# Altium PCB GSH_Bed v1.0.PcbDoc (part 3 of 6)
Units mil, origin at the board's own origin, x right, y up, seen from the top; angles counter-clockwise.
Board outline 4724.41 x 4921.3 mil, 2 copper layers (Top Layer, Bottom Layer); 2 components, 3 nets, 5 pads, 0 vias.
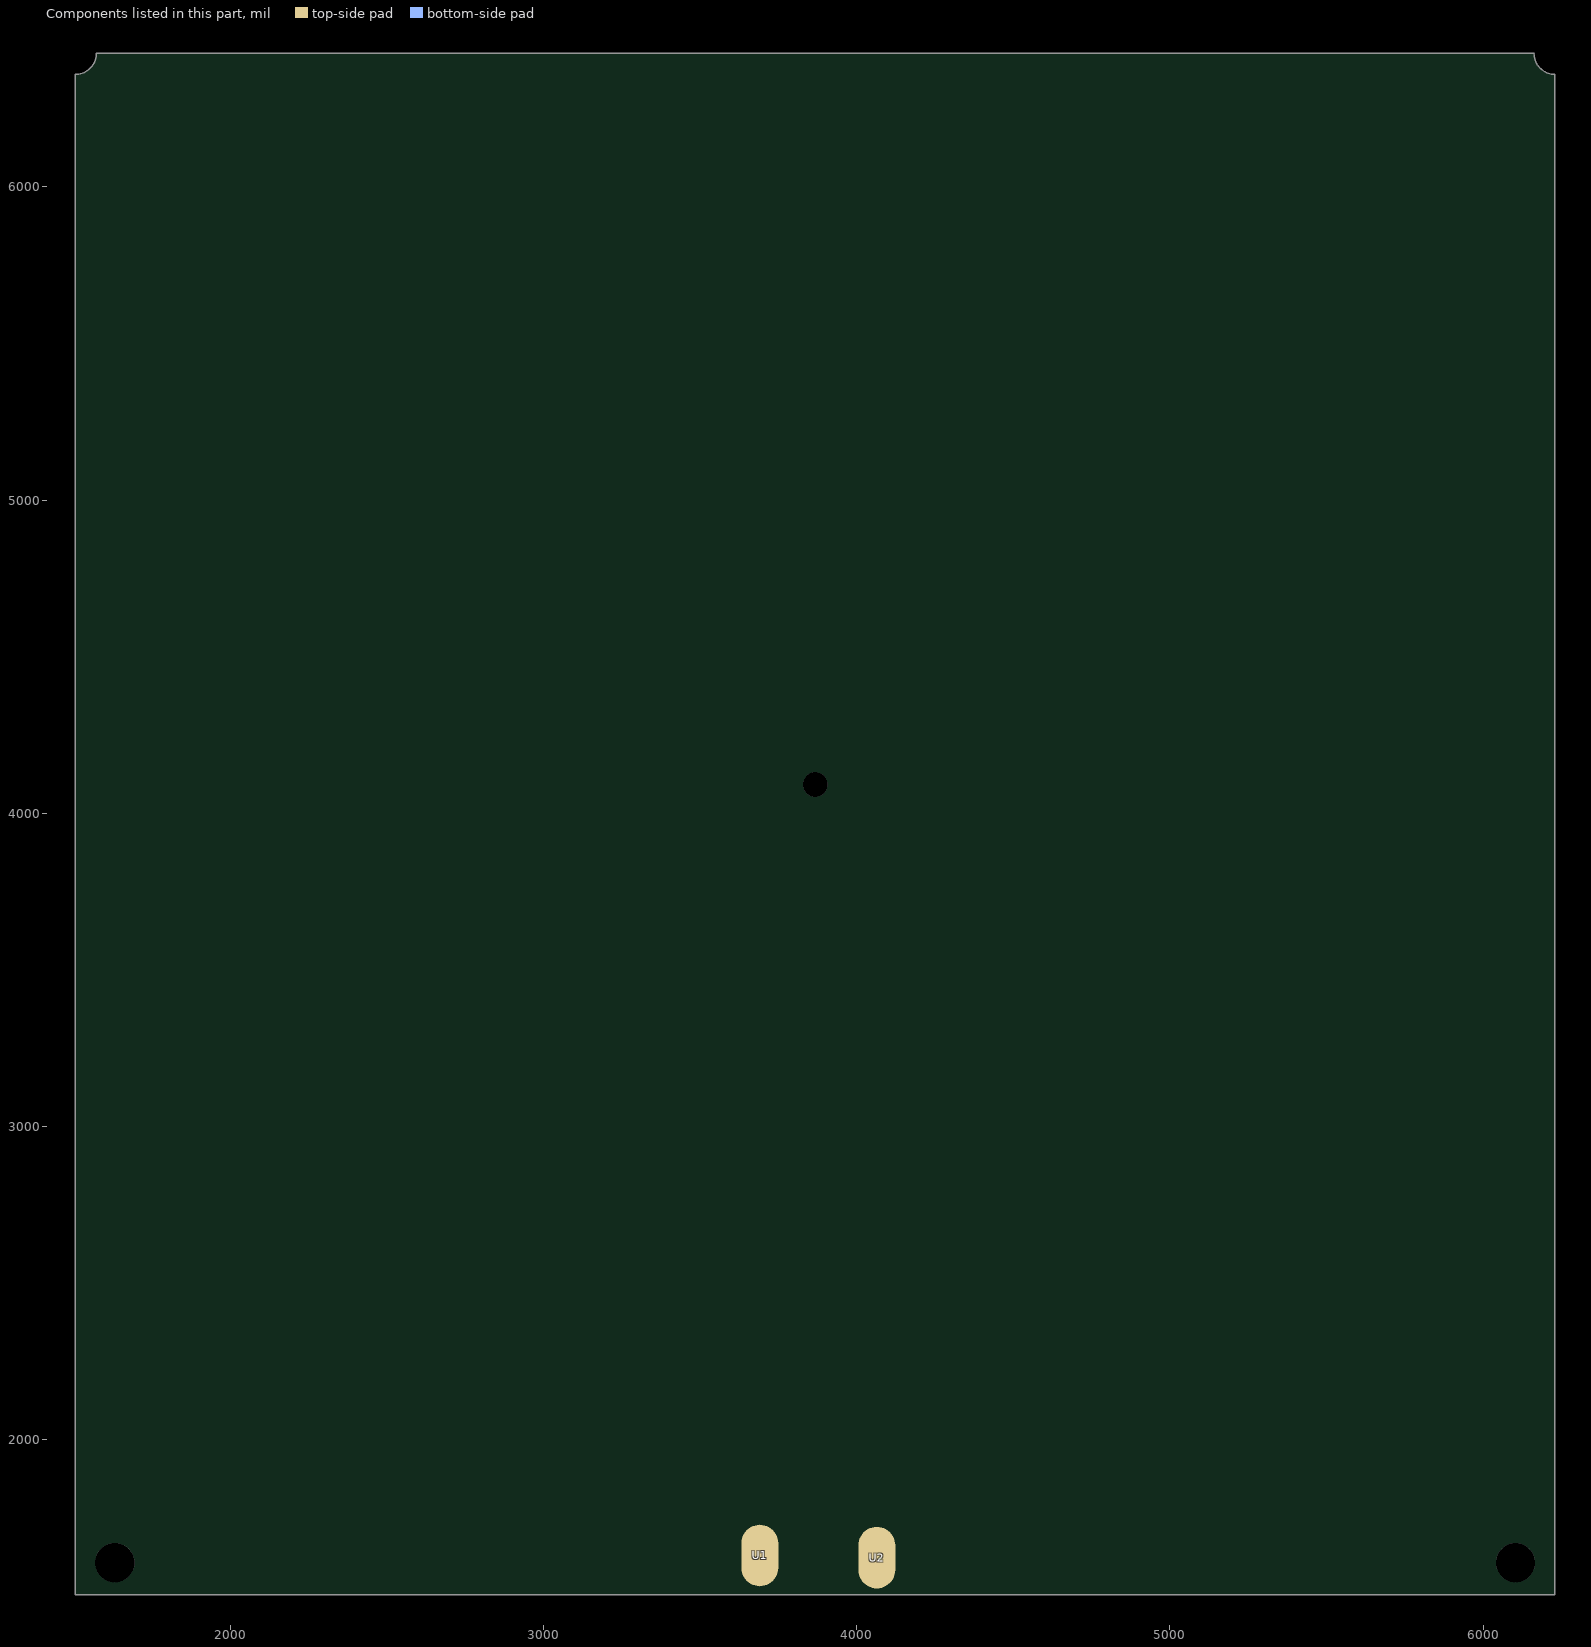
[diagram p3: the components of this part, seen from the top]

## Nets (pads, with @x,y where several pads share a name; then routed paths per layer and width w, separated by ;. In a path a pad name is that pad's centre, name@x,y a point inside that pad or via, vN(x,y) a via of type N, cw(c..) or ccw(c..) an arc to the next point about the centre after c; other vN are vias at no path point) (continued)
copper on no net: (continued)
  Top Layer w25.59: 1758.97,3213.62 1688.11,3213.62 1688.11,3249.07 1723.54,3249.07 1723.54,3319.93 1688.11,3319.93 1688.11,3284.5 1652.68,3284.5 1652.68,3319.93 1617.24,3319.93 1617.24,3249.07 1652.68,3249.07 1652.68,3213.63 1617.24,3213.63 1617.24,3142.77 1652.68,3142.77 1652.68,3178.2 1723.54,3178.2 1723.54,3142.77 1688.11,3142.77 1688.11,3107.33 1723.54,3107.33 1723.54,3071.9 1652.68,3071.9 1652.68,3107.33 1617.24,3107.33 1617.24,3036.47 1652.67,3036.47 1652.67,3001.03 1617.24,3001.03 1617.24,2930.17 1652.67,2930.17 1652.67,2965.59 1688.1,2965.59 1688.1,2930.17 1723.54,2930.17 1723.54,3001.03 1688.1,3001.03 1688.1,3036.46 1723.54,3036.46 1794.4,3036.46 1794.4,3001.02 1758.96,3001.02 1758.96,2930.16 1794.4,2930.16 1794.4,2965.59 1829.83,2965.59 1829.83,2930.16 1865.27,2930.16 1865.27,3001.02 1829.83,3001.02 1829.83,3036.46 1865.26,3036.46 1865.26,3107.32 1829.83,3107.32 1829.83,3071.89 1758.96,3071.89 1758.96,3107.32 1794.4,3107.32 1794.4,3142.75 1758.96,3142.75 1758.96,3178.19 1829.83,3178.19 1829.83,3142.75 1865.27,3142.75 1865.27,3178.19 1900.7,3178.19 1900.7,3142.76 1936.13,3142.76 1936.13,3178.19 2007,3178.19 2007,3142.76 1971.57,3142.76 1971.57,3107.33 2007,3107.33 2007,3071.89 1936.13,3071.89 1936.13,3107.33 1900.69,3107.33 1900.69,3036.46 1936.13,3036.46 1936.13,3001.02 1900.69,3001.02 1900.69,2930.16 1936.13,2930.16 1936.13,2965.59 1971.56,2965.59 1971.56,2930.16 2007,2930.16 2007,3001.02 1971.56,3001.02 1971.56,3036.45 2006.99,3036.45 2077.86,3036.45 2077.86,3001.01 2042.43,3001.01 2042.43,2930.15 2077.86,2930.15 2077.86,2965.58 2113.29,2965.58 2113.29,2930.15 2148.73,2930.15 2148.73,3001.01 2113.29,3001.01 2113.29,3036.45 2148.73,3036.45 2148.73,3107.32 2113.29,3107.32 2113.29,3071.88 2042.43,3071.88 2042.43,3107.32 2077.86,3107.32 2077.86,3142.75 2042.43,3142.75 2042.43,3178.18 2113.29,3178.18 2113.29,3142.75 2148.73,3142.75 2148.73,3178.18 2148.73,3213.61 2113.3,3213.61 2113.3,3249.05 2148.73,3249.05 2148.73,3319.92 2113.3,3319.92 2113.3,3284.48 2077.86,3284.48 2077.86,3319.92 2042.43,3319.92 2042.43,3249.05 2077.86,3249.05 2077.86,3213.62 2007,3213.62 2007,3249.05 1971.56,3249.05 1971.56,3213.62 1900.7,3213.62 1900.7,3249.05 1936.13,3249.05 1936.13,3284.48 1900.7,3284.48 1900.7,3319.92 1971.56,3319.92 1971.56,3284.48 2007,3284.48 2007,3355.35 2007,3390.78 1971.57,3390.78 1971.57,3355.35 1900.7,3355.35 1900.7,3390.78 1936.13,3390.78 1936.13,3426.22 1900.7,3426.22 1900.7,3461.65 1971.57,3461.65 1971.57,3426.22 2007.01,3426.22 2007.01,3461.65 2077.87,3461.65 2077.87,3426.21 2042.44,3426.21 2042.44,3355.35 2077.87,3355.35 2077.87,3390.78 2113.31,3390.78 2113.31,3355.35 2148.74,3355.35 2148.74,3426.21 2113.31,3426.21 2113.31,3461.64 2184.17,3461.64 2219.61,3461.64 2219.61,3426.2 2184.17,3426.2 2184.17,3355.33 2219.61,3355.33 2219.61,3390.77 2255.04,3390.77 2255.04,3355.33 2290.47,3355.33 2290.47,3426.2 2255.04,3426.2 2255.04,3461.63 2325.91,3461.63 2325.91,3426.2 2361.34,3426.2 2361.34,3461.64 2432.2,3461.64 2432.2,3426.2 2396.77,3426.2 2396.77,3390.77 2432.2,3390.77 2432.2,3355.33 2361.34,3355.33 2361.34,3390.77 2325.9,3390.77 2325.9,3319.9 2325.9,3284.47 2361.34,3284.47 2361.34,3319.9 2432.2,3319.9 2432.2,3284.47 2396.77,3284.47 2396.77,3249.04 2432.2,3249.04 2432.2,3213.6 2361.34,3213.6 2361.34,3249.04 2325.9,3249.04 2325.9,3213.6 2255.03,3213.6 2255.03,3249.04 2290.46,3249.04 2290.46,3319.9 2255.03,3319.9 2255.03,3284.47 2219.6,3284.47 2219.6,3319.9 2184.16,3319.9 2184.16,3249.04 2219.6,3249.04 2219.6,3213.61 2184.16,3213.61 2184.16,3142.74 2219.6,3142.74 2219.6,3178.18 2290.46,3178.18 2290.46,3142.74 2255.03,3142.74 2255.03,3107.31 2290.46,3107.31 2290.46,3071.88 2219.6,3071.88 2219.6,3107.31 2184.16,3107.31 2184.16,3036.45 2219.59,3036.45 2219.59,3001.01 2184.16,3001.01 2184.16,2930.14 2219.59,2930.14 2219.59,2965.57 2255.02,2965.57 2255.02,2930.14 2290.46,2930.14 2290.46,3001.01 2255.02,3001.01 2255.02,3036.44 2290.46,3036.44 2361.32,3036.44 2361.32,3001 2325.89,3001 2325.89,2930.14 2361.32,2930.14 2361.32,2965.57 2396.76,2965.57 2396.76,2930.14 2432.19,2930.14 2432.19,3001 2396.76,3001 2396.76,3036.43 2432.19,3036.43 2432.19,3107.3 2396.75,3107.3 2396.75,3071.87 2325.89,3071.87 2325.89,3107.3 2361.32,3107.3 2361.32,3142.73 2325.89,3142.73 2325.89,3178.17 2396.75,3178.17 2396.75,3142.73 2432.19,3142.73 2432.19,3178.17 2467.62,3178.17 2467.62,3142.74 2503.06,3142.74 2503.06,3178.17 2573.92,3178.17 2573.92,3142.74 2538.49,3142.74 2538.49,3107.3 2573.92,3107.3 2573.92,3071.87 2503.06,3071.87 2503.06,3107.3 2467.62,3107.3 2467.62,3036.44 2503.05,3036.44 2503.05,3001 2467.62,3001 2467.62,2930.14 2503.05,2930.14 2503.05,2965.57 2538.48,2965.57 2538.48,2930.14 2573.92,2930.14 2573.92,3001 2538.48,3001 2538.48,3036.43 2573.92,3036.43 2644.78,3036.43 2644.78,3000.99 2609.35,3000.99 2609.35,2930.13 2644.78,2930.13 2644.78,2965.56 2680.22,2965.56 2680.22,2930.13 2715.65,2930.13 2715.65,3000.99 2680.22,3000.99 2680.22,3036.43 2715.65,3036.43 2715.65,3107.3 2680.21,3107.3 2680.21,3071.86 2609.35,3071.86 2609.35,3107.3 2644.78,3107.3 2644.78,3142.73 2609.35,3142.73 2609.35,3178.16 2680.21,3178.16 2680.21,3142.73 2715.65,3142.73 2715.65,3178.16 2715.65,3213.59 2680.22,3213.59 2680.22,3249.03 2715.65,3249.03 2715.65,3319.9 2680.22,3319.9 2680.22,3284.47 2644.78,3284.47 2644.78,3319.9 2609.35,3319.9 2609.35,3249.03 2644.78,3249.03 2644.78,3213.6 2573.92,3213.6 2573.92,3249.03 2538.48,3249.03 2538.48,3213.6 2467.62,3213.6 2467.62,3249.03 2503.05,3249.03 2503.05,3284.46 2467.62,3284.46 2467.62,3319.9 2538.48,3319.9 2538.48,3284.46 2573.92,3284.46 2573.92,3355.33 2573.92,3390.76 2538.49,3390.76 2538.49,3355.33 2467.63,3355.33 2467.63,3390.76 2503.06,3390.76 2503.06,3426.19 2467.63,3426.19 2467.63,3461.63 2538.49,3461.63 2538.49,3426.19 2573.93,3426.19 2573.93,3461.63 2644.8,3461.63 2644.8,3426.19 2609.36,3426.19 2609.36,3355.33 2644.8,3355.33 2644.8,3390.76 2680.23,3390.76 2680.23,3355.33 2715.66,3355.33 2715.66,3426.19 2680.23,3426.19 2680.23,3461.62 2715.66,3461.62 2715.66,3532.49 2680.23,3532.49 2680.23,3497.05 2609.36,3497.05 2609.36,3532.49 2644.8,3532.49 2644.8,3567.92 2609.36,3567.92 2609.36,3603.35 2680.23,3603.35 2680.23,3567.92 2715.67,3567.92 2715.67,3638.78 2680.23,3638.79 2680.23,3674.23 2715.67,3674.23 2715.67,3745.09 2680.23,3745.09 2680.23,3709.66 2644.8,3709.66 2644.8,3745.09 2609.36,3745.09 2609.36,3674.23 2644.8,3674.23 2644.8,3638.79 2609.37,3638.79 2538.5,3638.79 2538.5,3674.23 2573.94,3674.23 2573.94,3745.09 2538.5,3745.09 2538.5,3709.66 2503.07,3709.66 2503.07,3745.09 2467.63,3745.09 2467.63,3674.23 2503.07,3674.23 2503.07,3638.8 2467.64,3638.8 2467.64,3567.93 2503.07,3567.93 2503.07,3603.36 2573.94,3603.36 2573.94,3567.93 2538.5,3567.93 2538.5,3532.5 2573.94,3532.5 2573.94,3497.06 2503.07,3497.06 2503.07,3532.5 2467.63,3532.5 2467.63,3497.06 2432.2,3497.06 2396.76,3497.06 2396.76,3532.5 2432.2,3532.5 2432.2,3603.37 2396.76,3603.37 2396.76,3567.93 2361.33,3567.93 2361.33,3603.37 2325.9,3603.37 2325.9,3532.5 2361.33,3532.5 2361.33,3497.07 2290.47,3497.07 2290.47,3532.5 2255.03,3532.5 2255.03,3497.07 2184.17,3497.07 2184.17,3532.5 2219.6,3532.5 2219.6,3567.93 2184.17,3567.93 2184.17,3603.37 2255.03,3603.37 2255.03,3567.93 2290.47,3567.93 2290.47,3638.8 2290.47,3674.23 2255.04,3674.23 2255.04,3638.8 2184.18,3638.8 2184.18,3674.23 2219.61,3674.23 2219.61,3709.66 2184.18,3709.66 2184.18,3745.1 2255.04,3745.1 2255.04,3709.66 2290.48,3709.66 2290.48,3745.1 2361.34,3745.1 2361.34,3709.66 2325.91,3709.66 2325.91,3638.8 2361.34,3638.8 2361.34,3674.23 2396.78,3674.23 2396.78,3638.8 2432.21,3638.8 2432.21,3709.66 2396.78,3709.66 2396.78,3745.09 2432.21,3745.09 2432.21,3780.52 2396.77,3780.52 2396.77,3815.96 2432.21,3815.96 2432.21,3886.83 2396.77,3886.83 2396.77,3851.39 2361.34,3851.39 2361.34,3886.83 2325.91,3886.83 2325.91,3815.96 2361.34,3815.96 2361.34,3780.53 2290.47,3780.53 2290.47,3815.96 2255.04,3815.96 2255.04,3780.53 2184.18,3780.53 2184.18,3815.96 2219.61,3815.96 2219.61,3851.39 2184.18,3851.39 2184.18,3886.83 2255.04,3886.83 2255.04,3851.39 2290.48,3851.39 2290.48,3922.26 2290.48,3957.69 2255.04,3957.69 2255.04,3922.26 2184.18,3922.26 2184.18,3957.69 2219.61,3957.69 2219.61,3993.12 2184.18,3993.12 2184.18,4028.56 2255.04,4028.56 2255.04,3993.12 2290.48,3993.12 2290.48,4028.56 2361.35,4028.56 2361.35,3993.12 2325.92,3993.12 2325.92,3922.26 2361.35,3922.26 2361.35,3957.68 2396.78,3957.68 2396.78,3922.26 2432.22,3922.26 2432.22,3993.12 2396.78,3993.12 2396.78,4028.55 2467.65,4028.55 2467.65,3993.12 2503.08,3993.12 2503.08,4028.55 2573.94,4028.55 2573.94,3993.12 2538.51,3993.12 2538.51,3957.68 2573.94,3957.68 2573.94,3922.25 2503.08,3922.25 2503.08,3957.68 2467.64,3957.68 2467.64,3886.82 2503.08,3886.82 2503.08,3851.38 2467.64,3851.38 2467.64,3780.52 2503.08,3780.52 2503.08,3815.95 2538.51,3815.95 2538.51,3780.52 2573.94,3780.52 2573.94,3851.38 2538.51,3851.38 2538.51,3886.81 2573.94,3886.81 2644.81,3886.81 2644.81,3851.37 2609.37,3851.37 2609.37,3780.51 2644.81,3780.51 2644.81,3815.94 2680.24,3815.94 2680.24,3780.51 2715.67,3780.51 2715.67,3851.37 2680.24,3851.37 2680.24,3886.81 2715.67,3886.81 2715.67,3957.68 2680.24,3957.68 2680.24,3922.24 2609.37,3922.24 2609.37,3957.68 2644.8,3957.68 2644.8,3993.11 2609.37,3993.11 2609.37,4028.54 2680.24,4028.54 2680.24,3993.11 2715.68,3993.11 2715.68,4028.54 2751.11,4028.54 2786.54,4028.54 2786.54,3993.1 2751.11,3993.1 2751.11,3922.24 2786.54,3922.24 2786.54,3957.67 2821.97,3957.67 2821.97,3922.24 2857.41,3922.24 2857.41,3993.1 2821.97,3993.1 2821.97,4028.54 2892.84,4028.54 2892.84,3993.11 2928.28,3993.11 2928.28,4028.54 2999.14,4028.54 2999.14,3993.11 2963.71,3993.11 2963.71,3957.67 2999.14,3957.67 2999.14,3922.24 2928.28,3922.24 2928.28,3957.67 2892.84,3957.67 2892.84,3886.81 2892.84,3851.37 2928.27,3851.37 2928.27,3886.81 2999.13,3886.81 2999.13,3851.37 2963.7,3851.37 2963.7,3815.94 2999.13,3815.94 2999.13,3780.51 2928.27,3780.51 2928.27,3815.94 2892.83,3815.94 2892.83,3780.51 2821.97,3780.51 2821.97,3815.95 2857.4,3815.95 2857.4,3886.81 2821.97,3886.81 2821.97,3851.38 2786.53,3851.38 2786.53,3886.81 2751.1,3886.81 2751.1,3815.95 2786.53,3815.95 2786.53,3780.51 2751.1,3780.51 2751.1,3709.65 2786.53,3709.65 2786.53,3745.08 2857.39,3745.08 2857.39,3709.65 2821.97,3709.65 2821.97,3674.22 2857.39,3674.22 2857.39,3638.78 2786.53,3638.78 2786.53,3674.22 2751.09,3674.22 2751.09,3603.35 2786.53,3603.35 2786.53,3567.91 2751.09,3567.91 2751.09,3497.05 2786.53,3497.05 2786.53,3532.48 2821.96,3532.48 2821.96,3497.05 2857.39,3497.05 2857.39,3567.91 2821.96,3567.91 2821.96,3603.34 2857.39,3603.34 2928.26,3603.34 2928.26,3567.91 2892.82,3567.91 2892.82,3497.04 2928.26,3497.04 2928.26,3532.47 2963.69,3532.47 2963.69,3497.04 2999.12,3497.04 2999.12,3567.91 2963.69,3567.91 2963.69,3603.34 2999.12,3603.34 2999.12,3674.21 2963.69,3674.21 2963.69,3638.77 2892.82,3638.77 2892.82,3674.21 2928.26,3674.21 2928.26,3709.64 2892.82,3709.64 2892.82,3745.07 2963.69,3745.07 2963.69,3709.64 2999.13,3709.64 2999.13,3745.07 3034.56,3745.07 3034.56,3709.64 3069.99,3709.64 3069.99,3745.07 3140.85,3745.07 3140.85,3709.64 3105.42,3709.64 3105.42,3674.21 3140.85,3674.21 3140.85,3638.77 3069.99,3638.77 3069.99,3674.21 3034.55,3674.21 3034.55,3603.34 3069.99,3603.34 3069.99,3567.9 3034.55,3567.9 3034.55,3497.04 3069.99,3497.04 3069.99,3532.47 3105.42,3532.47 3105.42,3497.04 3140.85,3497.04 3140.85,3567.9 3105.42,3567.9 3105.42,3603.34 3140.85,3603.34 3211.72,3603.34 3211.72,3567.9 3176.28,3567.9 3176.28,3497.03 3211.72,3497.03 3211.72,3532.47 3247.15,3532.47 3247.15,3497.03 3282.59,3497.03 3282.59,3567.9 3247.15,3567.9 3247.15,3603.33 3282.58,3603.33 3282.58,3674.2 3247.15,3674.2 3247.15,3638.76 3176.28,3638.76 3176.28,3674.2 3211.72,3674.2 3211.72,3709.63 3176.28,3709.63 3176.28,3745.07 3247.15,3745.07 3247.15,3709.63 3282.59,3709.63 3282.59,3745.07 3282.59,3780.5 3247.15,3780.5 3247.15,3815.94 3282.59,3815.94 3282.59,3886.8 3247.15,3886.8 3247.15,3851.37 3211.72,3851.37 3211.72,3886.8 3176.29,3886.8 3176.29,3815.94 3211.72,3815.94 3211.72,3780.51 3140.85,3780.51 3140.85,3815.93 3105.42,3815.93 3105.42,3780.5 3034.55,3780.5 3034.55,3815.93 3069.99,3815.93 3069.99,3851.37 3034.55,3851.37 3034.55,3886.8 3105.42,3886.8 3105.42,3851.37 3140.86,3851.37 3140.86,3922.24 3140.86,3957.67 3105.42,3957.67 3105.42,3922.23 3034.56,3922.23 3034.56,3957.67 3069.99,3957.67 3069.99,3993.1 3034.56,3993.1 3034.56,4028.53 3105.42,4028.53 3105.42,3993.1 3140.86,3993.1 3140.86,4028.53 3211.73,4028.53 3211.73,3993.09 3176.3,3993.09 3176.3,3922.23 3211.73,3922.23 3211.73,3957.66 3247.16,3957.66 3247.16,3922.23 3282.6,3922.23 3282.6,3993.09 3247.16,3993.09 3247.16,4028.53 3318.03,4028.53 3318.03,3993.09 3353.46,3993.09 3353.46,4028.53 3424.32,4028.53 3424.32,3993.09 3388.89,3993.09 3388.89,3957.66 3424.32,3957.66 3424.32,3922.23 3353.46,3922.23 3353.46,3957.66 3318.02,3957.66 3318.02,3886.8 3353.46,3886.79 3353.46,3851.36 3318.02,3851.36 3318.02,3780.49 3353.46,3780.49 3353.46,3815.92 3388.89,3815.92 3388.89,3780.49 3424.32,3780.49 3424.32,3851.36 3388.89,3851.36 3388.89,3886.79 3424.32,3886.79 3495.19,3886.79 3495.19,3851.35 3459.75,3851.35 3459.75,3780.49 3495.19,3780.49 3495.19,3815.92 3530.62,3815.92 3530.62,3780.49 3566.05,3780.49 3566.05,3851.35 3530.62,3851.35 3530.62,3886.78 3566.05,3886.78 3566.05,3957.65 3530.62,3957.65 3530.62,3922.22 3459.75,3922.22 3459.75,3957.65 3495.18,3957.65 3495.18,3993.08 3459.75,3993.08 3459.75,4028.52 3530.62,4028.52 3530.62,3993.08 3566.06,3993.08 3566.06,4028.52 3601.49,4028.52 3636.92,4028.52 3636.92,3993.08 3601.49,3993.08 3601.49,3922.21 3636.92,3922.21 3636.92,3957.65 3672.36,3957.65 3672.36,3922.21 3707.79,3922.21 3707.79,3993.08 3672.36,3993.08 3672.36,4028.51 3743.22,4028.51 3743.22,3993.08 3778.66,3993.08 3778.66,4028.51 3849.52,4028.51 3849.52,3993.08 3814.09,3993.08 3814.09,3957.65 3849.52,3957.65 3849.52,3922.21 3778.66,3922.21 3778.66,3957.65 3743.22,3957.65 3743.22,3886.78 3743.22,3851.35 3778.65,3851.35 3778.65,3886.78 3849.51,3886.78 3849.51,3851.35 3814.08,3851.35 3814.08,3815.92 3849.51,3815.92 3849.51,3780.48 3778.65,3780.48 3778.65,3815.92 3743.21,3815.92 3743.21,3780.48 3672.35,3780.48 3672.35,3815.92 3707.78,3815.92 3707.78,3886.78 3672.35,3886.78 3672.35,3851.36 3636.91,3851.36 3636.91,3886.78 3601.48,3886.78 3601.48,3815.92 3636.91,3815.92 3636.91,3780.49 3601.48,3780.49 3601.48,3745.06 3636.92,3745.06 3636.92,3709.62 3601.48,3709.62 3601.48,3638.76 3636.92,3638.76 3636.92,3674.19 3672.35,3674.19 3672.35,3638.76 3707.78,3638.76 3707.78,3709.62 3672.35,3709.62 3672.35,3745.05 3743.22,3745.05 3743.22,3709.62 3778.65,3709.62 3778.65,3745.06 3849.51,3745.06 3849.51,3709.62 3814.08,3709.62 3814.08,3674.19 3849.51,3674.19 3849.51,3638.76 3778.65,3638.76 3778.65,3674.19 3743.21,3674.19 3743.21,3603.32 3743.21,3567.89 3778.64,3567.89 3778.64,3603.32 3849.51,3603.32 3849.51,3567.89 3814.08,3567.89 3814.08,3532.46 3849.51,3532.46 3849.51,3497.02 3778.64,3497.02 3778.64,3532.46 3743.2,3532.46 3743.2,3497.02 3672.34,3497.02 3672.34,3532.46 3707.77,3532.46 3707.77,3603.32 3672.34,3603.32 3672.34,3567.89 3636.91,3567.89 3636.91,3603.32 3601.47,3603.32 3601.47,3532.46 3636.91,3532.46 3636.91,3497.03 3566.04,3497.03 3566.04,3532.46 3530.61,3532.46 3530.61,3497.03 3459.75,3497.03 3459.75,3532.46 3495.18,3532.46 3495.18,3567.89 3459.75,3567.89 3459.75,3603.33 3530.61,3603.33 3530.61,3567.89 3566.05,3567.89 3566.05,3638.76 3530.61,3638.76 3530.61,3674.2 3566.05,3674.2 3566.05,3745.06 3530.61,3745.06 3530.61,3709.63 3495.18,3709.63 3495.18,3745.06 3459.75,3745.06 3459.75,3674.2 3495.18,3674.2 3495.18,3638.77 3459.75,3638.77 3388.88,3638.77 3388.88,3674.21 3424.32,3674.21 3424.32,3745.07 3388.88,3745.07 3388.88,3709.64 3353.45,3709.64 3353.45,3745.07 3318.01,3745.07 3318.01,3674.21 3353.45,3674.21 3353.45,3638.77 3318.02,3638.77 3318.02,3567.91 3353.45,3567.91 3353.45,3603.34 3424.32,3603.34 3424.32,3567.91 3388.88,3567.91 3388.88,3532.47 3424.32,3532.47 3424.32,3497.04 3353.45,3497.04 3353.45,3532.47 3318.01,3532.47 3318.01,3497.04 3318.01,3426.17 3353.44,3426.17 3353.44,3461.61 3424.3,3461.61 3424.3,3426.17 3388.87,3426.17 3388.87,3390.74 3424.3,3390.74 3424.3,3355.3 3353.44,3355.3 3353.44,3390.74 3318,3390.74 3318,3319.87 3353.43,3319.87 3353.43,3284.43 3318,3284.43 3318,3213.57 3353.43,3213.57 3353.43,3249 3388.87,3249 3388.87,3213.57 3424.3,3213.57 3424.3,3284.43 3388.87,3284.43 3388.87,3319.87 3424.3,3319.87 3495.17,3319.87 3495.17,3284.43 3459.73,3284.43 3459.73,3213.56 3495.17,3213.56 3495.17,3248.99 3530.6,3248.99 3530.6,3213.56 3566.03,3213.56 3566.03,3284.43 3530.6,3284.43 3530.6,3319.86 3566.03,3319.86 3566.03,3390.73 3530.59,3390.73 3530.59,3355.29 3459.73,3355.29 3459.73,3390.73 3495.17,3390.73 3495.17,3426.16 3459.73,3426.16 3459.73,3461.6 3530.59,3461.6 3530.59,3426.16 3566.03,3426.16 3566.03,3461.6 3601.46,3461.6 3636.9,3461.6 3636.9,3426.16 3601.47,3426.16 3601.47,3355.29 3636.9,3355.29 3636.9,3390.72 3672.33,3390.72 3672.33,3355.29 3707.77,3355.29 3707.77,3426.16 3672.33,3426.16 3672.33,3461.59 3743.2,3461.59 3743.2,3426.16 3778.64,3426.16 3778.64,3461.59 3849.5,3461.59 3849.5,3426.16 3814.07,3426.16 3814.07,3390.73 3849.5,3390.73 3849.5,3355.29 3778.64,3355.29 3778.64,3390.73 3743.2,3390.73 3743.2,3319.86 3743.2,3284.43 3778.63,3284.43 3778.63,3319.86 3849.49,3319.86 3849.49,3284.43 3814.06,3284.43 3814.06,3248.99 3849.49,3248.99 3849.49,3213.56 3778.63,3213.56 3778.63,3248.99 3743.19,3248.99 3743.19,3213.56 3672.32,3213.56 3672.32,3249 3707.76,3249 3707.76,3319.86 3672.32,3319.86 3672.32,3284.43 3636.89,3284.43 3636.89,3319.86 3601.46,3319.86 3601.46,3249 3636.89,3249 3636.89,3213.56 3601.46,3213.57 3601.46,3178.14 3636.9,3178.14 3636.9,3142.7 3601.46,3142.7 3601.46,3071.83 3636.9,3071.83 3636.9,3107.26 3672.33,3107.26 3672.33,3071.83 3707.76,3071.83 3707.76,3142.7 3672.33,3142.7 3672.33,3178.13 3743.19,3178.13 3743.19,3142.7 3778.63,3142.7 3778.63,3178.14 3849.49,3178.14 3849.49,3142.7 3814.06,3142.7 3814.06,3107.26 3849.49,3107.26 3849.49,3071.83 3778.63,3071.83 3778.63,3107.26 3743.19,3107.26 3743.19,3036.4 3743.19,3000.97 3778.62,3000.97 3778.62,3036.4 3849.48,3036.4 3849.48,3000.97 3814.05,3000.97 3814.05,2965.54 3849.48,2965.54 3849.48,2930.1 3778.62,2930.1 3778.62,2965.54 3743.18,2965.54 3743.18,2930.1 3672.32,2930.1 3672.32,2965.54 3707.75,2965.54 3707.75,3036.4 3672.32,3036.4 3672.32,3000.97 3636.88,3000.97 3636.88,3036.4 3601.45,3036.4 3601.45,2965.54 3636.88,2965.54 3636.88,2930.11 3566.02,2930.11 3566.02,2965.54 3530.59,2965.54 3530.59,2930.11 3459.72,2930.11 3459.72,2965.54 3495.15,2965.54 3495.15,3000.97 3459.72,3000.97 3459.72,3036.41 3530.59,3036.41 3530.59,3000.97 3566.03,3000.97 3566.03,3071.84 3530.59,3071.84 3530.59,3107.28 3566.03,3107.28 3566.03,3178.14 3530.59,3178.14 3530.59,3142.71 3495.16,3142.71 3495.16,3178.14 3459.72,3178.14 3459.72,3107.28 3495.16,3107.28 3495.16,3071.85 3459.73,3071.85 3388.86,3071.85 3388.86,3107.28 3424.29,3107.28 3424.29,3178.15 3388.86,3178.15 3388.86,3142.72 3353.43,3142.72 3353.43,3178.15 3317.99,3178.15 3317.99,3107.28 3353.43,3107.28 3353.43,3071.85 3317.99,3071.85 3317.99,3000.98 3353.43,3000.98 3353.43,3036.42 3424.29,3036.42 3424.29,3000.98 3388.86,3000.98 3388.86,2965.55 3424.29,2965.55 3424.29,2930.12 3353.43,2930.12 3353.43,2965.55 3317.99,2965.55 3317.99,2930.12 3282.56,2930.12 3247.13,2930.12 3247.13,2965.56 3282.56,2965.56 3282.56,3036.42 3247.13,3036.42 3247.13,3000.99 3211.69,3000.99 3211.69,3036.42 3176.26,3036.42 3176.26,2965.56 3211.69,2965.56 3211.69,2930.12 3140.83,2930.12 3140.83,2965.56 3105.39,2965.56 3105.39,2930.12 3034.53,2930.12 3034.53,2965.56 3069.96,2965.56 3069.96,3000.99 3034.53,3000.99 3034.53,3036.42 3105.39,3036.42 3105.39,3000.99 3140.83,3000.99 3140.83,3071.86 3140.83,3107.28 3105.39,3107.28 3105.39,3071.85 3034.54,3071.85 3034.54,3107.28 3069.97,3107.28 3069.97,3142.72 3034.54,3142.72 3034.54,3178.15 3105.39,3178.15 3105.39,3142.72 3140.84,3142.72 3140.84,3178.15 3211.71,3178.15 3211.71,3142.72 3176.27,3142.72 3176.27,3071.85 3211.71,3071.85 3211.71,3107.28 3247.14,3107.28 3247.14,3071.85 3282.57,3071.85 3282.57,3142.72 3247.14,3142.72 3247.14,3178.15 3282.57,3178.14 3282.57,3249.01 3247.14,3249.01 3247.14,3213.58 3176.27,3213.58 3176.27,3249.01 3211.71,3249.01 3211.71,3284.44 3176.27,3284.44 3176.27,3319.88 3247.14,3319.88 3247.14,3284.44 3282.57,3284.44 3282.57,3355.31 3247.14,3355.31 3247.14,3390.75 3282.57,3390.75 3282.57,3461.61 3247.14,3461.61 3247.14,3426.18 3211.71,3426.18 3211.71,3461.61 3176.27,3461.61 3176.27,3390.75 3211.71,3390.75 3211.71,3355.32 3176.27,3355.32 3105.41,3355.32 3105.41,3390.76 3140.85,3390.76 3140.85,3461.62 3105.41,3461.62 3105.41,3426.19 3069.98,3426.19 3069.98,3461.62 3034.54,3461.62 3034.54,3390.76 3069.98,3390.76 3069.98,3355.32 3034.55,3355.32 3034.55,3284.45 3069.98,3284.45 3069.98,3319.89 3140.85,3319.89 3140.85,3284.45 3105.41,3284.45 3105.41,3249.02 3140.85,3249.02 3140.85,3213.59 3069.98,3213.59 3069.98,3249.02 3034.54,3249.02 3034.54,3213.59 2999.11,3213.59 2999.11,3249.02 2963.68,3249.02 2963.68,3213.59 2892.81,3213.59 2892.81,3249.02 2928.24,3249.02 2928.24,3284.45 2892.81,3284.45 2892.81,3319.89 2963.68,3319.89 2963.68,3284.45 2999.12,3284.45 2999.12,3355.32 2963.68,3355.32 2963.68,3390.76 2999.12,3390.76 2999.12,3461.62 2963.68,3461.62 2963.68,3426.19 2928.25,3426.19 2928.25,3461.62 2892.81,3461.62 2892.81,3390.76 2928.25,3390.76 2928.25,3355.32 2892.82,3355.32 2821.95,3355.32 2821.95,3390.76 2857.39,3390.76 2857.39,3461.63 2821.95,3461.63 2821.95,3426.2 2786.52,3426.2 2786.52,3461.63 2751.09,3461.63 2751.09,3390.76 2786.52,3390.76 2786.52,3355.33 2751.09,3355.33 2751.09,3284.46 2786.52,3284.46 2786.52,3319.9 2857.39,3319.9 2857.39,3284.46 2821.95,3284.46 2821.95,3249.03 2857.39,3249.03 2857.39,3213.59 2786.52,3213.59 2786.52,3249.03 2751.08,3249.03 2751.08,3213.59 2751.08,3178.16 2786.52,3178.16 2786.52,3142.72 2751.08,3142.72 2751.08,3071.86 2786.52,3071.86 2786.52,3107.3 2821.95,3107.3 2821.95,3071.86 2857.39,3071.86 2857.39,3142.72 2821.95,3142.72 2821.95,3178.15 2892.81,3178.15 2892.81,3142.72 2928.25,3142.72 2928.25,3178.16 2999.11,3178.16 2999.11,3142.72 2963.68,3142.72 2963.68,3107.3 2999.11,3107.3 2999.11,3071.86 2928.25,3071.86 2928.25,3107.3 2892.81,3107.3 2892.81,3036.43 2892.81,3001 2928.24,3001 2928.24,3036.43 2999.11,3036.43 2999.11,3001 2963.68,3001 2963.68,2965.56 2999.11,2965.56 2999.11,2930.13 2928.24,2930.13 2928.24,2965.56 2892.8,2965.56 2892.8,2930.13 2821.94,2930.13 2821.94,2965.57 2857.38,2965.57 2857.38,3036.43 2821.94,3036.43 2821.94,3001 2786.51,3001 2786.51,3036.43 2751.07,3036.43 2751.07,2965.57 2786.51,2965.57 2786.51,2930.13 2751.07,2930.14 2751.07,2894.7 2786.51,2894.7 2786.51,2859.26 2751.07,2859.26 2751.07,2788.4 2786.51,2788.4 2786.51,2823.83 2821.94,2823.83 2821.94,2788.4 2857.37,2788.4 2857.37,2859.26 2821.94,2859.26 2821.94,2894.7 2892.8,2894.7 2892.8,2859.27 2928.24,2859.27 2928.24,2894.7 2999.1,2894.7 2999.1,2859.27 2963.67,2859.27 2963.67,2823.84 2999.1,2823.84 2999.1,2788.4 2928.24,2788.4 2928.24,2823.84 2892.8,2823.84 2892.8,2752.97 2892.8,2717.54 2928.24,2717.54 2928.24,2752.97 2999.1,2752.97 2999.1,2717.54 2963.67,2717.54 2963.67,2682.1 2999.1,2682.1 2999.1,2646.67 2928.24,2646.67 2928.24,2682.1 2892.8,2682.1 2892.8,2646.67 2821.93,2646.67 2821.93,2682.11 2857.36,2682.11 2857.36,2752.97 2821.93,2752.97 2821.93,2717.54 2786.5,2717.54 2786.5,2752.97 2751.06,2752.97 2751.06,2682.11 2786.5,2682.11 2786.5,2646.68 2751.07,2646.68 2751.06,2575.81 2786.5,2575.81 2786.5,2611.24 2857.36,2611.24 2857.36,2575.81 2821.93,2575.81 2821.93,2540.38 2857.36,2540.38 2857.36,2504.94 2786.5,2504.94 2786.5,2540.38 2751.06,2540.38 2751.06,2469.51 2786.49,2469.51 2786.49,2434.07 2751.06,2434.07 2751.06,2363.21 2786.49,2363.21 2786.49,2398.64 2821.92,2398.64 2821.92,2363.21 2857.36,2363.21 2857.36,2434.07 2821.92,2434.07 2821.92,2469.51 2857.36,2469.51 2928.22,2469.51 2928.22,2434.07 2892.79,2434.07 2892.79,2363.2 2928.22,2363.2 2928.22,2398.64 2963.66,2398.64 2963.66,2363.2 2999.09,2363.2 2999.09,2434.07 2963.66,2434.07 2963.66,2469.5 2999.09,2469.5 2999.09,2540.37 2963.65,2540.37 2963.65,2504.93 2892.79,2504.93 2892.79,2540.37 2928.22,2540.37 2928.22,2575.8 2892.79,2575.8 2892.79,2611.24 2963.65,2611.24 2963.65,2575.8 2999.09,2575.8 2999.09,2611.24 3034.52,2611.24 3034.52,2575.8 3069.96,2575.8 3069.96,2611.24 3140.82,2611.24 3140.82,2575.8 3105.39,2575.8 3105.39,2540.37 3140.82,2540.37 3140.82,2504.94 3069.96,2504.94 3069.96,2540.37 3034.52,2540.37 3034.52,2469.51 3069.95,2469.5 3069.95,2434.07 3034.52,2434.07 3034.52,2363.2 3069.95,2363.2 3069.95,2398.63 3105.38,2398.63 3105.38,2363.2 3140.82,2363.2 3140.82,2434.07 3105.38,2434.07 3105.38,2469.5 3140.82,2469.5 3211.68,2469.5 3211.68,2434.06 3176.25,2434.06 3176.25,2363.2 3211.68,2363.2 3211.68,2398.63 3247.11,2398.63 3247.11,2363.2 3282.55,2363.2 3282.55,2434.06 3247.11,2434.06 3247.11,2469.49 3282.55,2469.49 3282.55,2540.36 3247.11,2540.36 3247.11,2504.93 3176.25,2504.93 3176.25,2540.36 3211.68,2540.36 3211.68,2575.79 3176.25,2575.79 3176.25,2611.23 3247.11,2611.23 3247.11,2575.79 3282.55,2575.79 3282.55,2611.23 3282.55,2646.66 3247.12,2646.66 3247.12,2682.1 3282.55,2682.1 3282.55,2752.96 3247.12,2752.96 3247.12,2717.53 3211.68,2717.53 3211.68,2752.96 3176.25,2752.96 3176.25,2682.1 3211.68,2682.1 3211.68,2646.67 3140.82,2646.67 3140.82,2682.1 3105.38,2682.1 3105.38,2646.66 3034.52,2646.66 3034.52,2682.1 3069.95,2682.1 3069.95,2717.53 3034.52,2717.53 3034.52,2752.96 3105.38,2752.96 3105.38,2717.53 3140.82,2717.53 3140.82,2788.4 3140.82,2823.83 3105.39,2823.83 3105.39,2788.39 3034.53,2788.39 3034.53,2823.83 3069.96,2823.83 3069.96,2859.26 3034.53,2859.26 3034.53,2894.7 3105.39,2894.7 3105.39,2859.26 3140.83,2859.26 3140.83,2894.7 3211.69,2894.7 3211.69,2859.26 3176.26,2859.26 3176.26,2788.39 3211.69,2788.39 3211.69,2823.82 3247.13,2823.82 3247.13,2788.39 3282.56,2788.39 3282.56,2859.26 3247.13,2859.26 3247.13,2894.69 3317.99,2894.69 3317.99,2859.26 3353.43,2859.26 3353.43,2894.69 3424.29,2894.69 3424.29,2859.26 3388.86,2859.26 3388.86,2823.82 3424.29,2823.82 3424.29,2788.39 3353.43,2788.39 3353.43,2823.82 3317.99,2823.82 3317.99,2752.96 3353.42,2752.96 3353.42,2717.52 3317.99,2717.52 3317.99,2646.66 3353.42,2646.66 3353.42,2682.09 3388.85,2682.09 3388.85,2646.66 3424.29,2646.66 3424.29,2717.52 3388.85,2717.52 3388.85,2752.95 3424.28,2752.95 3495.15,2752.95 3495.15,2717.51 3459.72,2717.51 3459.72,2646.65 3495.15,2646.65 3495.15,2682.08 3530.58,2682.08 3530.58,2646.65 3566.02,2646.65 3566.02,2717.51 3530.58,2717.51 3530.58,2752.95 3566.01,2752.95 3566.01,2823.81 3530.58,2823.81 3530.58,2788.38 3459.72,2788.38 3459.72,2823.81 3495.15,2823.81 3495.15,2859.24 3459.72,2859.24 3459.72,2894.68 3530.58,2894.68 3530.58,2859.24 3566.02,2859.24 3566.02,2894.68 3601.45,2894.68 3636.89,2894.68 3636.89,2859.24 3601.45,2859.24 3601.45,2788.38 3636.89,2788.38 3636.89,2823.81 3672.32,2823.81 3672.32,2788.38 3707.75,2788.38 3707.75,2859.24 3672.32,2859.24 3672.32,2894.68 3743.19,2894.68 3743.19,2859.24 3778.62,2859.24 3778.62,2894.68 3849.49,2894.68 3849.49,2859.24 3814.05,2859.24 3814.05,2823.81 3849.49,2823.81 3849.49,2788.38 3778.62,2788.38 3778.62,2823.81 3743.18,2823.81 3743.18,2752.94 3743.18,2717.51 3778.62,2717.51 3778.62,2752.95 3849.48,2752.95 3849.48,2717.51 3814.05,2717.51 3814.05,2682.08 3849.48,2682.08 3849.48,2646.64 3778.62,2646.64 3778.62,2682.08 3743.18,2682.08 3743.18,2646.64 ; 1758.97,3213.62 1758.97,3249.06 1794.41,3249.06 1794.41,3213.62 1865.27,3213.62 1865.27,3249.06 1829.84,3249.06 1829.84,3284.49 1865.27,3284.49 1865.27,3319.93 1794.41,3319.93 1794.41,3284.49 1758.98,3284.49 1758.98,3319.92 1758.98,3390.79 1794.42,3390.79 1794.42,3355.36 1865.28,3355.36 1865.28,3390.79 1829.85,3390.79 1829.85,3426.22 1865.28,3426.22 1865.28,3461.66 1794.42,3461.66 1794.42,3426.22 1758.98,3426.22 1758.98,3461.66 1688.12,3461.66 1688.12,3426.22 1723.55,3426.22 1723.55,3355.36 1688.12,3355.36 1688.12,3390.79 1652.69,3390.79 1652.69,3355.36 1617.25,3355.36 1617.25,3426.22 1652.69,3426.22 1652.69,3461.66 1617.25,3461.66 1617.25,3497.09 1617.25,3532.52 1652.69,3532.52 1652.69,3497.09 1723.56,3497.09 1723.56,3532.52 1688.12,3532.52 1688.12,3567.96 1723.56,3567.96 1723.56,3603.39 1652.69,3603.39 1652.69,3567.96 1617.26,3567.96 1617.26,3638.82 1652.69,3638.82 1652.69,3674.26 1617.26,3674.26 1617.26,3745.12 1652.69,3745.12 1652.69,3709.69 1688.12,3709.69 1688.12,3745.12 1723.56,3745.12 1723.56,3674.26 1688.12,3674.26 1688.12,3638.82 1758.99,3638.82 1794.42,3638.82 1794.42,3674.26 1758.98,3674.26 1758.98,3745.11 1794.42,3745.11 1794.42,3709.68 1829.85,3709.68 1829.85,3745.11 1865.29,3745.11 1865.29,3674.26 1829.85,3674.26 1829.85,3638.81 1865.29,3638.81 1865.29,3567.94 1829.85,3567.94 1829.85,3603.38 1758.98,3603.38 1758.98,3567.94 1794.41,3567.94 1794.41,3532.51 1758.98,3532.51 1758.98,3497.08 1829.85,3497.08 1829.85,3532.51 1865.28,3532.51 1865.28,3497.08 1936.15,3497.08 1936.15,3532.51 1900.71,3532.51 1900.71,3603.38 1936.15,3603.38 1936.15,3567.94 1971.58,3567.94 1971.58,3603.38 2007.01,3603.38 2007.01,3532.51 1971.58,3532.51 1971.58,3497.07 2042.44,3497.07 2042.45,3532.51 2077.89,3532.51 2077.89,3497.07 2148.75,3497.07 2148.75,3532.51 2113.32,3532.51 2113.32,3567.94 2148.75,3567.94 2148.75,3603.38 2077.89,3603.38 2077.89,3567.94 2042.45,3567.94 2042.45,3603.38 2042.45,3674.24 2077.89,3674.24 2077.89,3638.8 2148.76,3638.8 2148.76,3674.24 2113.32,3674.24 2113.32,3709.67 2148.76,3709.67 2148.76,3745.11 2077.89,3745.11 2077.89,3709.67 2042.46,3709.67 2042.46,3745.1 1971.59,3745.1 1971.59,3709.67 2007.02,3709.67 2007.02,3638.8 1971.59,3638.8 1971.59,3674.24 1936.16,3674.24 1936.16,3638.8 1900.72,3638.8 1900.72,3709.67 1936.16,3709.67 1936.16,3745.11 1900.72,3745.11 1900.72,3780.54 1936.15,3780.54 1936.15,3815.97 1900.72,3815.97 1900.72,3886.84 1936.15,3886.84 1936.15,3851.41 1971.59,3851.41 1971.59,3886.84 2007.02,3886.84 2007.02,3815.97 1971.59,3815.97 1971.59,3780.53 2042.45,3780.53 2042.45,3815.97 2077.89,3815.97 2077.89,3780.53 2148.76,3780.53 2148.76,3815.97 2113.32,3815.97 2113.32,3851.4 2148.76,3851.4 2148.76,3886.84 2077.89,3886.84 2077.89,3851.4 2042.46,3851.4 2042.46,3886.83 2042.46,3957.7 2077.9,3957.7 2077.9,3922.26 2148.76,3922.26 2148.76,3957.7 2113.33,3957.7 2113.33,3993.13 2148.76,3993.13 2148.76,4028.56 2077.9,4028.56 2077.9,3993.13 2042.46,3993.13 2042.46,4028.56 1971.6,4028.56 1971.6,3993.13 2007.03,3993.13 2007.03,3922.26 1971.6,3922.26 1971.6,3957.7 1936.16,3957.7 1936.16,3922.26 1900.73,3922.26 1900.73,3993.13 1936.16,3993.13 1936.16,4028.57 1900.73,4028.57 1865.3,4028.57 1865.3,3993.13 1829.86,3993.13 1829.86,4028.57 1758.99,4028.57 1758.99,3993.13 1794.43,3993.13 1794.43,3957.7 1758.99,3957.7 1758.99,3922.26 1829.86,3922.26 1829.86,3957.7 1865.29,3957.7 1865.29,3886.84 1829.86,3886.84 1829.86,3851.4 1865.29,3851.4 1865.29,3780.54 1829.86,3780.54 1829.86,3815.97 1794.43,3815.97 1794.43,3780.54 1758.99,3780.54 1758.99,3851.4 1794.43,3851.4 1794.43,3886.84 1723.56,3886.84 1688.13,3886.84 1688.13,3851.41 1723.56,3851.41 1723.56,3780.54 1688.13,3780.54 1688.13,3815.97 1652.69,3815.97 1652.69,3780.54 1617.26,3780.54 1617.26,3851.41 1652.69,3851.41 1652.69,3886.84 1617.26,3886.84 1617.26,3957.71 1652.7,3957.71 1652.7,3922.28 1723.56,3922.28 1723.56,3957.71 1688.13,3957.71 1688.13,3993.14 1723.56,3993.14 1723.56,4028.58 1652.7,4028.58 1652.7,3993.14 1617.27,3993.14 1617.27,4028.58 1617.27,4064.01 1652.7,4064.01 1652.7,4099.44 1617.27,4099.44 1617.27,4170.31 1652.7,4170.31 1652.7,4134.88 1688.14,4134.88 1688.14,4170.31 1723.57,4170.31 1723.57,4099.44 1688.14,4099.44 1688.14,4064 1759,4064 1759,4099.44 1794.44,4099.44 1794.44,4064 1865.3,4064 1865.3,4099.44 1829.88,4099.44 1829.88,4134.87 1865.3,4134.87 1865.3,4170.31 1794.44,4170.31 1794.44,4134.87 1759.01,4134.87 1759.01,4170.3 1759.01,4241.17 1794.45,4241.17 1794.45,4205.73 1865.31,4205.73 1865.31,4241.17 1829.88,4241.17 1829.88,4276.6 1865.31,4276.6 1865.31,4312.03 1794.45,4312.03 1794.45,4276.6 1759.01,4276.6 1759.01,4312.03 1688.15,4312.03 1688.15,4276.6 1723.58,4276.6 1723.58,4205.73 1688.15,4205.73 1688.15,4241.17 1652.71,4241.17 1652.71,4205.73 1617.28,4205.73 1617.28,4276.6 1652.71,4276.6 1652.71,4312.04 1617.28,4312.04 1617.28,4347.47 1617.28,4382.9 1652.72,4382.9 1652.72,4347.47 1723.58,4347.47 1723.58,4382.9 1688.15,4382.9 1688.15,4418.34 1723.58,4418.34 1723.58,4453.77 1652.72,4453.77 1652.72,4418.34 1617.28,4418.34 1617.28,4489.2 1652.72,4489.2 1652.72,4524.64 1617.28,4524.64 1617.28,4595.5 1652.72,4595.5 1652.72,4560.07 1688.15,4560.07 1688.15,4595.5 1723.58,4595.5 1723.58,4524.64 1688.15,4524.64 1688.15,4489.2 1759.02,4489.2 1794.45,4489.2 1794.45,4524.63 1759.01,4524.63 1759.01,4595.5 1794.45,4595.5 1794.45,4560.07 1829.88,4560.07 1829.88,4595.5 1865.32,4595.5 1865.32,4524.63 1829.88,4524.63 1829.88,4489.19 1865.32,4489.19 1865.32,4418.33 1829.88,4418.33 1829.88,4453.76 1759.01,4453.76 1759.01,4418.33 1794.44,4418.33 1794.44,4382.89 1759.01,4382.89 1759.01,4347.46 1829.88,4347.46 1829.88,4382.89 1865.31,4382.89 1865.3,4347.46 1900.74,4347.46 1900.74,4382.9 1936.18,4382.9 1936.18,4347.46 2007.04,4347.46 2007.04,4382.9 1971.61,4382.9 1971.61,4418.33 2007.04,4418.33 2007.04,4453.76 1936.18,4453.76 1936.18,4418.33 1900.74,4418.33 1900.74,4489.2 1936.17,4489.2 1936.17,4524.63 1900.74,4524.63 1900.74,4595.5 1936.17,4595.5 1936.17,4560.06 1971.61,4560.06 1971.61,4595.5 2007.04,4595.5 2007.04,4524.63 1971.61,4524.63 1971.61,4489.19 2042.47,4489.19 2077.91,4489.19 2077.91,4524.63 2042.47,4524.63 2042.47,4595.49 2077.91,4595.49 2077.91,4560.06 2113.34,4560.06 2113.34,4595.49 2148.77,4595.49 2148.77,4524.63 2113.34,4524.63 2113.34,4489.19 2148.77,4489.19 2148.77,4418.32 2113.33,4418.32 2113.33,4453.75 2042.47,4453.75 2042.47,4418.32 2077.9,4418.32 2077.9,4382.89 2042.47,4382.89 2042.47,4347.45 2113.33,4347.45 2113.33,4382.89 2148.76,4382.89 2148.76,4312.02 2113.33,4312.02 2113.33,4276.59 2148.76,4276.59 2148.76,4205.73 2113.33,4205.73 2113.33,4241.15 2077.9,4241.15 2077.9,4205.73 2042.47,4205.73 2042.47,4276.59 2077.9,4276.59 2077.9,4312.03 2007.04,4312.03 2007.04,4276.6 1971.59,4276.6 1971.59,4312.03 1900.74,4312.03 1900.74,4276.6 1936.16,4276.6 1936.16,4241.16 1900.74,4241.16 1900.74,4205.73 1971.59,4205.73 1971.59,4241.16 2007.03,4241.16 2007.03,4205.73 2007.03,4134.86 1971.59,4134.86 1971.59,4170.3 1900.72,4170.3 1900.72,4134.86 1936.16,4134.86 1936.16,4099.43 1900.72,4099.43 1900.72,4064 1971.59,4064 1971.59,4099.43 2007.03,4099.43 2007.03,4064 2077.89,4064 2077.89,4099.43 2042.46,4099.43 2042.46,4170.3 2077.89,4170.3 2077.89,4134.87 2113.32,4134.87 2113.32,4170.3 2148.76,4170.3 2148.76,4099.43 2113.32,4099.43 2113.32,4063.99 2148.76,4063.99 2184.19,4063.99 2184.19,4099.43 2219.63,4099.43 2219.63,4063.99 2290.49,4063.99 2290.49,4099.43 2255.06,4099.43 2255.06,4134.86 2290.49,4134.86 2290.49,4170.29 2219.63,4170.29 2219.63,4134.86 2184.19,4134.86 2184.19,4205.73 2219.62,4205.73 2219.62,4241.16 2184.19,4241.16 2184.19,4312.02 2219.62,4312.02 2219.62,4276.59 2255.06,4276.59 2255.06,4312.02 2290.49,4312.02 2290.49,4241.16 2255.06,4241.16 2255.06,4205.72 2325.93,4205.72 2361.36,4205.72 2361.36,4241.15 2325.92,4241.15 2325.92,4312.01 2361.36,4312.01 2361.36,4276.59 2396.79,4276.59 2396.79,4312.01 2432.22,4312.01 2432.22,4241.15 2396.79,4241.15 2396.79,4205.72 2432.22,4205.72 2432.22,4134.85 2396.78,4134.85 2396.78,4170.28 2325.92,4170.28 2325.92,4134.85 2361.35,4134.85 2361.35,4099.42 2325.92,4099.42 2325.92,4063.98 2396.78,4063.98 2396.78,4099.42 2432.22,4099.42 2432.22,4063.98 2503.08,4063.98 2503.08,4099.42 2467.65,4099.42 2467.65,4170.28 2503.08,4170.28 2503.08,4134.85 2538.51,4134.85 2538.51,4170.28 2573.95,4170.28 2573.95,4099.42 2538.51,4099.42 2538.51,4063.98 2609.38,4063.98 2609.38,4099.41 2644.82,4099.41 2644.82,4063.98 2715.68,4063.98 2715.68,4099.41 2680.25,4099.41 2680.25,4134.84 2715.68,4134.84 2715.68,4170.28 2644.82,4170.28 2644.82,4134.84 2609.39,4134.84 2609.39,4170.28 2609.39,4241.14 2644.82,4241.14 2644.82,4205.71 2715.69,4205.71 2715.69,4241.14 2680.26,4241.14 2680.26,4276.57 2715.69,4276.57 2715.69,4312.01 2644.82,4312.01 2644.82,4276.57 2609.39,4276.57 2609.39,4312.01 2538.52,4312.01 2538.52,4276.57 2573.96,4276.57 2573.96,4205.71 2538.52,4205.71 2538.52,4241.14 2503.09,4241.14 2503.09,4205.71 2467.66,4205.71 2467.66,4276.57 2503.09,4276.57 2503.09,4312.01 2467.66,4312.01 2467.66,4347.44 2503.09,4347.44 2503.09,4382.87 2467.66,4382.87 2467.66,4453.74 2503.09,4453.74 2503.09,4418.31 2538.52,4418.31 2538.52,4453.74 2573.96,4453.74 2573.96,4382.87 2538.52,4382.87 2538.52,4347.43 2609.39,4347.43 2609.39,4382.87 2644.83,4382.87 2644.83,4347.43 2715.69,4347.43 2715.69,4382.87 2680.26,4382.87 2680.26,4418.3 2715.69,4418.3 2715.69,4453.74 2644.83,4453.74 2644.83,4418.3 2609.39,4418.3 2609.39,4453.73 2609.39,4524.6 2644.83,4524.6 2644.83,4489.17 2715.7,4489.17 2715.7,4524.6 2680.26,4524.6 2680.26,4560.03 2715.7,4560.03 2715.7,4595.47 2644.83,4595.47 2644.83,4560.03 2609.4,4560.03 2609.4,4595.47 2538.53,4595.47 2538.53,4560.03 2573.97,4560.03 2573.97,4489.17 2538.53,4489.17 2538.53,4524.6 2503.1,4524.6 2503.1,4489.17 2467.66,4489.17 2467.66,4560.03 2503.1,4560.03 2503.1,4595.47 2467.66,4595.47 2432.23,4595.47 2432.23,4560.04 2396.79,4560.04 2396.79,4595.47 2325.93,4595.47 2325.93,4560.04 2361.36,4560.04 2361.36,4524.6 2325.93,4524.6 2325.93,4489.17 2396.79,4489.17 2396.79,4524.6 2432.22,4524.6 2432.22,4453.74 2396.8,4453.74 2396.8,4418.3 2432.23,4418.3 2432.23,4347.44 2396.8,4347.44 2396.8,4382.87 2361.36,4382.87 2361.36,4347.44 2325.93,4347.44 2325.93,4418.3 2361.36,4418.3 2361.36,4453.74 2290.49,4453.74 2255.06,4453.74 2255.06,4418.31 2290.5,4418.31 2290.5,4347.44 2255.06,4347.44 2255.06,4382.87 2219.63,4382.87 2219.63,4347.44 2184.2,4347.44 2184.2,4418.31 2219.63,4418.31 2219.63,4453.75 2184.2,4453.75 2184.2,4524.61 2219.64,4524.61 2219.64,4489.18 2290.5,4489.18 2290.5,4524.61 2255.07,4524.61 2255.07,4560.05 2290.5,4560.05 2290.5,4595.48 2219.64,4595.48 2219.64,4560.05 2184.2,4560.05 2184.21,4630.91 2184.21,4666.35 2219.65,4666.35 2219.65,4630.91 2290.51,4630.91 2290.51,4666.35 2255.08,4666.35 2255.08,4701.78 2290.51,4701.78 2290.51,4737.22 2219.65,4737.22 2219.65,4701.78 2184.22,4701.78 2184.22,4772.65 2219.65,4772.65 2219.65,4808.08 2184.21,4808.08 2184.21,4878.95 2219.65,4878.95 2219.65,4843.51 2255.08,4843.51 2255.08,4878.95 2290.51,4878.95 2290.51,4808.08 2255.08,4808.08 2255.08,4772.64 2325.95,4772.64 2361.38,4772.64 2361.38,4808.07 2325.94,4808.07 2325.94,4878.94 2361.38,4878.94 2361.38,4843.51 2396.81,4843.51 2396.81,4878.94 2432.24,4878.94 2432.24,4808.07 2396.81,4808.07 2396.81,4772.64 2432.24,4772.64 2432.24,4701.77 2396.8,4701.77 2396.8,4737.2 2325.94,4737.2 2325.94,4701.77 2361.37,4701.77 2361.37,4666.34 2325.94,4666.34 2325.94,4630.9 2396.8,4630.9 2396.8,4666.34 2432.24,4666.34 2432.24,4630.91 2503.1,4630.9 2503.1,4666.34 2467.67,4666.34 2467.67,4737.2 2503.1,4737.2 2503.1,4701.77 2538.54,4701.77 2538.54,4737.2 2573.97,4737.2 2573.97,4666.34 2538.54,4666.34 2538.54,4630.9 2609.4,4630.9 2609.4,4666.33 2644.84,4666.33 2644.84,4630.9 2715.7,4630.9 2715.7,4666.33 2680.27,4666.33 2680.27,4701.77 2715.7,4701.77 2715.7,4737.2 2644.84,4737.2 2644.84,4701.77 2609.41,4701.77 2609.41,4737.2 2609.41,4808.06 2644.85,4808.06 2644.85,4772.63 2715.71,4772.63 2715.71,4808.06 2680.28,4808.06 2680.28,4843.49 2715.71,4843.49 2715.71,4878.93 2644.85,4878.93 2644.85,4843.49 2609.41,4843.49 2609.41,4878.93 2538.55,4878.93 2538.55,4843.49 2573.98,4843.49 2573.98,4772.63 2538.55,4772.63 2538.55,4808.06 2503.11,4808.06 2503.11,4772.63 2467.68,4772.63 2467.68,4843.49 2503.11,4843.49 2503.11,4878.93 2467.68,4878.93 2467.68,4914.37 2503.11,4914.36 2503.11,4949.8 2467.68,4949.8 2467.68,5020.66 2503.11,5020.66 2503.11,4985.23 2538.54,4985.23 2538.54,5020.66 2573.98,5020.66 2573.98,4949.8 2538.54,4949.8 2538.54,4914.36 2609.41,4914.36 2609.41,4949.79 2644.85,4949.79 2644.85,4914.36 2715.71,4914.36 2715.71,4949.79 2680.28,4949.79 2680.28,4985.23 2715.71,4985.23 2715.71,5020.66 2644.85,5020.66 2644.85,4985.23 2609.41,4985.23 2609.41,5020.66 2609.41,5091.53 2644.85,5091.53 2644.85,5056.09 2715.72,5056.09 2715.72,5091.53 2680.29,5091.53 2680.29,5126.96 2715.72,5126.96 2715.72,5162.39 2644.85,5162.39 2644.85,5126.96 2609.42,5126.96 2609.42,5162.39 2538.55,5162.39 2538.55,5126.95 2573.99,5126.95 2573.99,5056.09 2538.55,5056.09 2538.55,5091.52 2503.12,5091.52 2503.12,5056.09 2467.69,5056.09 2467.69,5126.95 2503.12,5126.95 2503.12,5162.4 2467.69,5162.4 2432.25,5162.4 2432.25,5126.96 2396.82,5126.96 2396.82,5162.4 2325.95,5162.4 2325.95,5126.96 2361.38,5126.96 2361.38,5091.53 2325.95,5091.53 2325.95,5056.09 2396.82,5056.09 2396.82,5091.53 2432.25,5091.53 2432.25,5020.66 2396.82,5020.66 2396.82,4985.23 2432.25,4985.23 2432.25,4914.36 2396.82,4914.36 2396.82,4949.79 2361.39,4949.79 2361.39,4914.36 2325.95,4914.36 2325.95,4985.23 2361.39,4985.23 2361.39,5020.66 2290.52,5020.66 2255.09,5020.66 2255.09,4985.23 2290.52,4985.23 2290.52,4914.37 2255.09,4914.37 2255.09,4949.8 2219.65,4949.8 2219.65,4914.37 2184.22,4914.37 2184.22,4985.23 2219.65,4985.23 2219.65,5020.67 2184.22,5020.67 2184.22,5091.54 2219.66,5091.54 2219.66,5056.1 2290.52,5056.1 2290.52,5091.54 2255.09,5091.54 2255.09,5126.97 2290.52,5126.97 2290.52,5162.4 2219.66,5162.4 2219.66,5126.97 2184.22,5126.97 2184.23,5162.4 ; 3140.92,6012.75 3140.92,5977.32 3105.48,5977.32 3105.48,6012.75 3034.62,6012.75 3034.62,5977.32 3070.05,5977.32 3070.05,5941.88 3034.62,5941.88 3034.62,5906.45 3105.48,5906.45 3105.48,5941.88 3140.92,5941.88 3140.92,5906.45 3140.92,5835.58 3105.48,5835.58 3105.48,5871.02 3034.61,5871.02 3034.61,5835.58 3070.05,5835.58 3070.05,5800.15 3034.61,5800.15 3034.61,5764.72 3105.48,5764.72 3105.48,5800.15 3140.91,5800.15 3140.91,5764.72 3211.78,5764.72 3211.78,5800.16 3176.35,5800.16 3176.35,5871.02 3211.78,5871.02 3211.78,5835.59 3247.21,5835.59 3247.21,5871.02 3282.65,5871.02 3282.65,5800.16 3247.21,5800.16 3247.21,5764.72 3282.65,5764.72 3353.51,5764.71 3353.51,5800.14 3318.08,5800.14 3318.08,5871 3353.51,5871 3353.51,5835.58 3388.95,5835.58 3388.95,5871 3424.38,5871 3424.38,5800.14 3388.95,5800.14 3388.95,5764.7 3459.81,5764.7 3459.81,5800.14 3495.25,5800.14 3495.25,5764.7 3566.12,5764.7 3566.12,5800.14 3530.69,5800.14 3530.69,5835.57 3566.12,5835.57 3566.12,5871 3495.25,5871 3495.25,5835.57 3459.82,5835.57 3459.82,5871 3459.82,5941.87 3495.26,5941.87 3495.26,5906.44 3566.12,5906.44 3566.12,5941.87 3530.69,5941.87 3530.69,5977.3 3566.12,5977.3 3566.12,6012.74 3495.26,6012.74 3495.26,5977.3 3459.82,5977.3 3459.82,6012.73 3388.96,6012.73 3388.96,5977.3 3424.39,5977.3 3424.39,5906.44 3388.96,5906.44 3388.96,5941.87 3353.52,5941.87 3353.52,5906.44 3318.09,5906.44 3318.09,5977.3 3353.52,5977.3 3353.52,6012.74 3318.09,6012.74 3318.09,6048.17 3318.09,6083.61 3353.53,6083.61 3353.53,6048.17 3424.39,6048.17 3424.39,6083.61 3388.96,6083.61 3388.96,6119.04 3424.39,6119.04 3424.39,6154.48 3353.53,6154.48 3353.53,6119.04 3318.09,6119.04 3318.09,6189.9 3353.53,6189.9 3353.53,6225.34 3318.09,6225.34 3318.09,6296.2 3353.53,6296.2 3353.53,6260.77 3388.96,6260.77 3388.96,6296.2 3424.39,6296.2 3424.39,6225.34 3388.96,6225.34 3388.96,6189.9 3459.83,6189.9 3495.26,6189.9 3495.26,6225.34 3459.82,6225.34 3459.82,6296.2 3495.26,6296.2 3495.26,6260.77 3530.69,6260.77 3530.69,6296.2 3566.13,6296.2 3566.13,6225.34 3530.69,6225.34 3530.69,6189.9 3566.13,6189.9 3566.13,6119.03 3530.69,6119.03 3530.69,6154.46 3459.82,6154.46 3459.82,6119.03 3495.25,6119.03 3495.25,6083.6 3459.82,6083.6 3459.82,6048.16 3530.69,6048.16 3530.69,6083.6 3566.12,6083.6 3566.12,6048.16 3601.55,6048.16 3601.55,6083.6 3636.99,6083.6 3636.99,6048.16 3707.86,6048.16 3707.86,6083.6 3672.42,6083.6 3672.42,6119.03 3707.86,6119.03 3707.86,6154.47 3636.99,6154.47 3636.99,6119.03 3601.56,6119.03 3601.56,6189.9 3636.99,6189.9 3636.99,6225.33 3601.55,6225.33 3601.55,6296.2 3636.99,6296.2 3636.99,6260.76 3672.42,6260.76 3672.42,6296.2 3707.86,6296.2 3707.86,6225.33 3672.42,6225.33 3672.42,6189.9 3743.28,6189.9 3778.72,6189.9 3778.72,6225.33 3743.28,6225.33 3743.28,6296.19 3778.72,6296.19 3778.72,6260.76 3814.15,6260.76 3814.15,6296.19 3849.58,6296.19 3849.58,6225.33 3814.15,6225.33 3814.15,6189.89 3849.58,6189.89 3849.58,6119.02 3814.14,6119.02 3814.14,6154.46 3743.28,6154.46 3743.28,6119.02 3778.71,6119.02 3778.71,6083.59 3743.28,6083.59 3743.28,6048.16 3814.14,6048.16 3814.14,6083.59 3849.58,6083.59 3849.58,6012.72 3814.14,6012.73 3814.14,5977.29 3849.58,5977.29 3849.58,5906.43 3814.14,5906.43 3814.14,5941.86 3778.71,5941.86 3778.71,5906.43 3743.28,5906.43 3743.28,5977.29 3778.71,5977.29 3778.71,6012.73 3707.85,6012.73 3707.84,5977.29 3672.41,5977.29 3672.41,6012.73 3601.55,6012.73 3601.55,5977.29 3636.98,5977.29 3636.98,5941.86 3601.55,5941.86 3601.55,5906.43 3672.41,5906.43 3672.41,5941.86 3707.84,5941.86 3707.84,5906.43 3707.84,5835.56 3672.4,5835.56 3672.4,5871 3601.54,5871 3601.54,5835.56 3636.97,5835.56 3636.97,5800.13 3601.54,5800.13 3601.54,5764.7 3672.4,5764.7 3672.4,5800.13 3707.84,5800.13 3707.84,5764.7 3778.7,5764.7 3778.7,5800.14 3743.27,5800.14 3743.27,5871 3778.7,5871 3778.7,5835.57 3814.13,5835.57 3814.13,5871 3849.57,5871 3849.57,5800.14 3814.13,5800.14 3814.13,5764.69 3849.57,5764.69 3849.57,5729.27 3849.57,5693.83 3814.13,5693.83 3814.13,5729.27 3743.26,5729.27 3743.26,5693.83 3778.7,5693.83 3778.7,5658.4 3743.26,5658.4 3743.26,5622.97 3814.13,5622.97 3814.13,5658.4 3849.56,5658.4 3849.56,5587.53 3814.13,5587.53 3814.13,5552.1 3849.56,5552.1 3849.56,5481.23 3814.13,5481.23 3814.13,5516.67 3778.7,5516.67 3778.7,5481.23 3743.26,5481.23 3743.26,5552.1 3778.7,5552.1 3778.7,5587.54 3707.83,5587.54 3672.4,5587.54 3672.4,5552.1 3707.84,5552.1 3707.84,5481.24 3672.4,5481.24 3672.4,5516.67 3636.97,5516.67 3636.97,5481.24 3601.53,5481.24 3601.53,5552.1 3636.97,5552.1 3636.97,5587.54 3601.53,5587.54 3601.53,5658.41 3636.97,5658.41 3636.97,5622.98 3707.84,5622.98 3707.84,5658.41 3672.41,5658.41 3672.41,5693.84 3707.84,5693.84 3707.84,5729.27 3636.97,5729.27 3636.97,5693.84 3601.54,5693.84 3601.54,5729.27 3530.67,5729.27 3530.67,5693.84 3566.11,5693.84 3566.11,5622.98 3530.67,5622.98 3530.67,5658.41 3495.24,5658.41 3495.24,5622.98 3459.81,5622.98 3459.81,5693.84 3495.24,5693.84 3495.24,5729.28 3424.38,5729.28